# Allegro board SENSOR_PLATFORM_BREAKOUT_BOARD_REV01_2014-08-13.brd
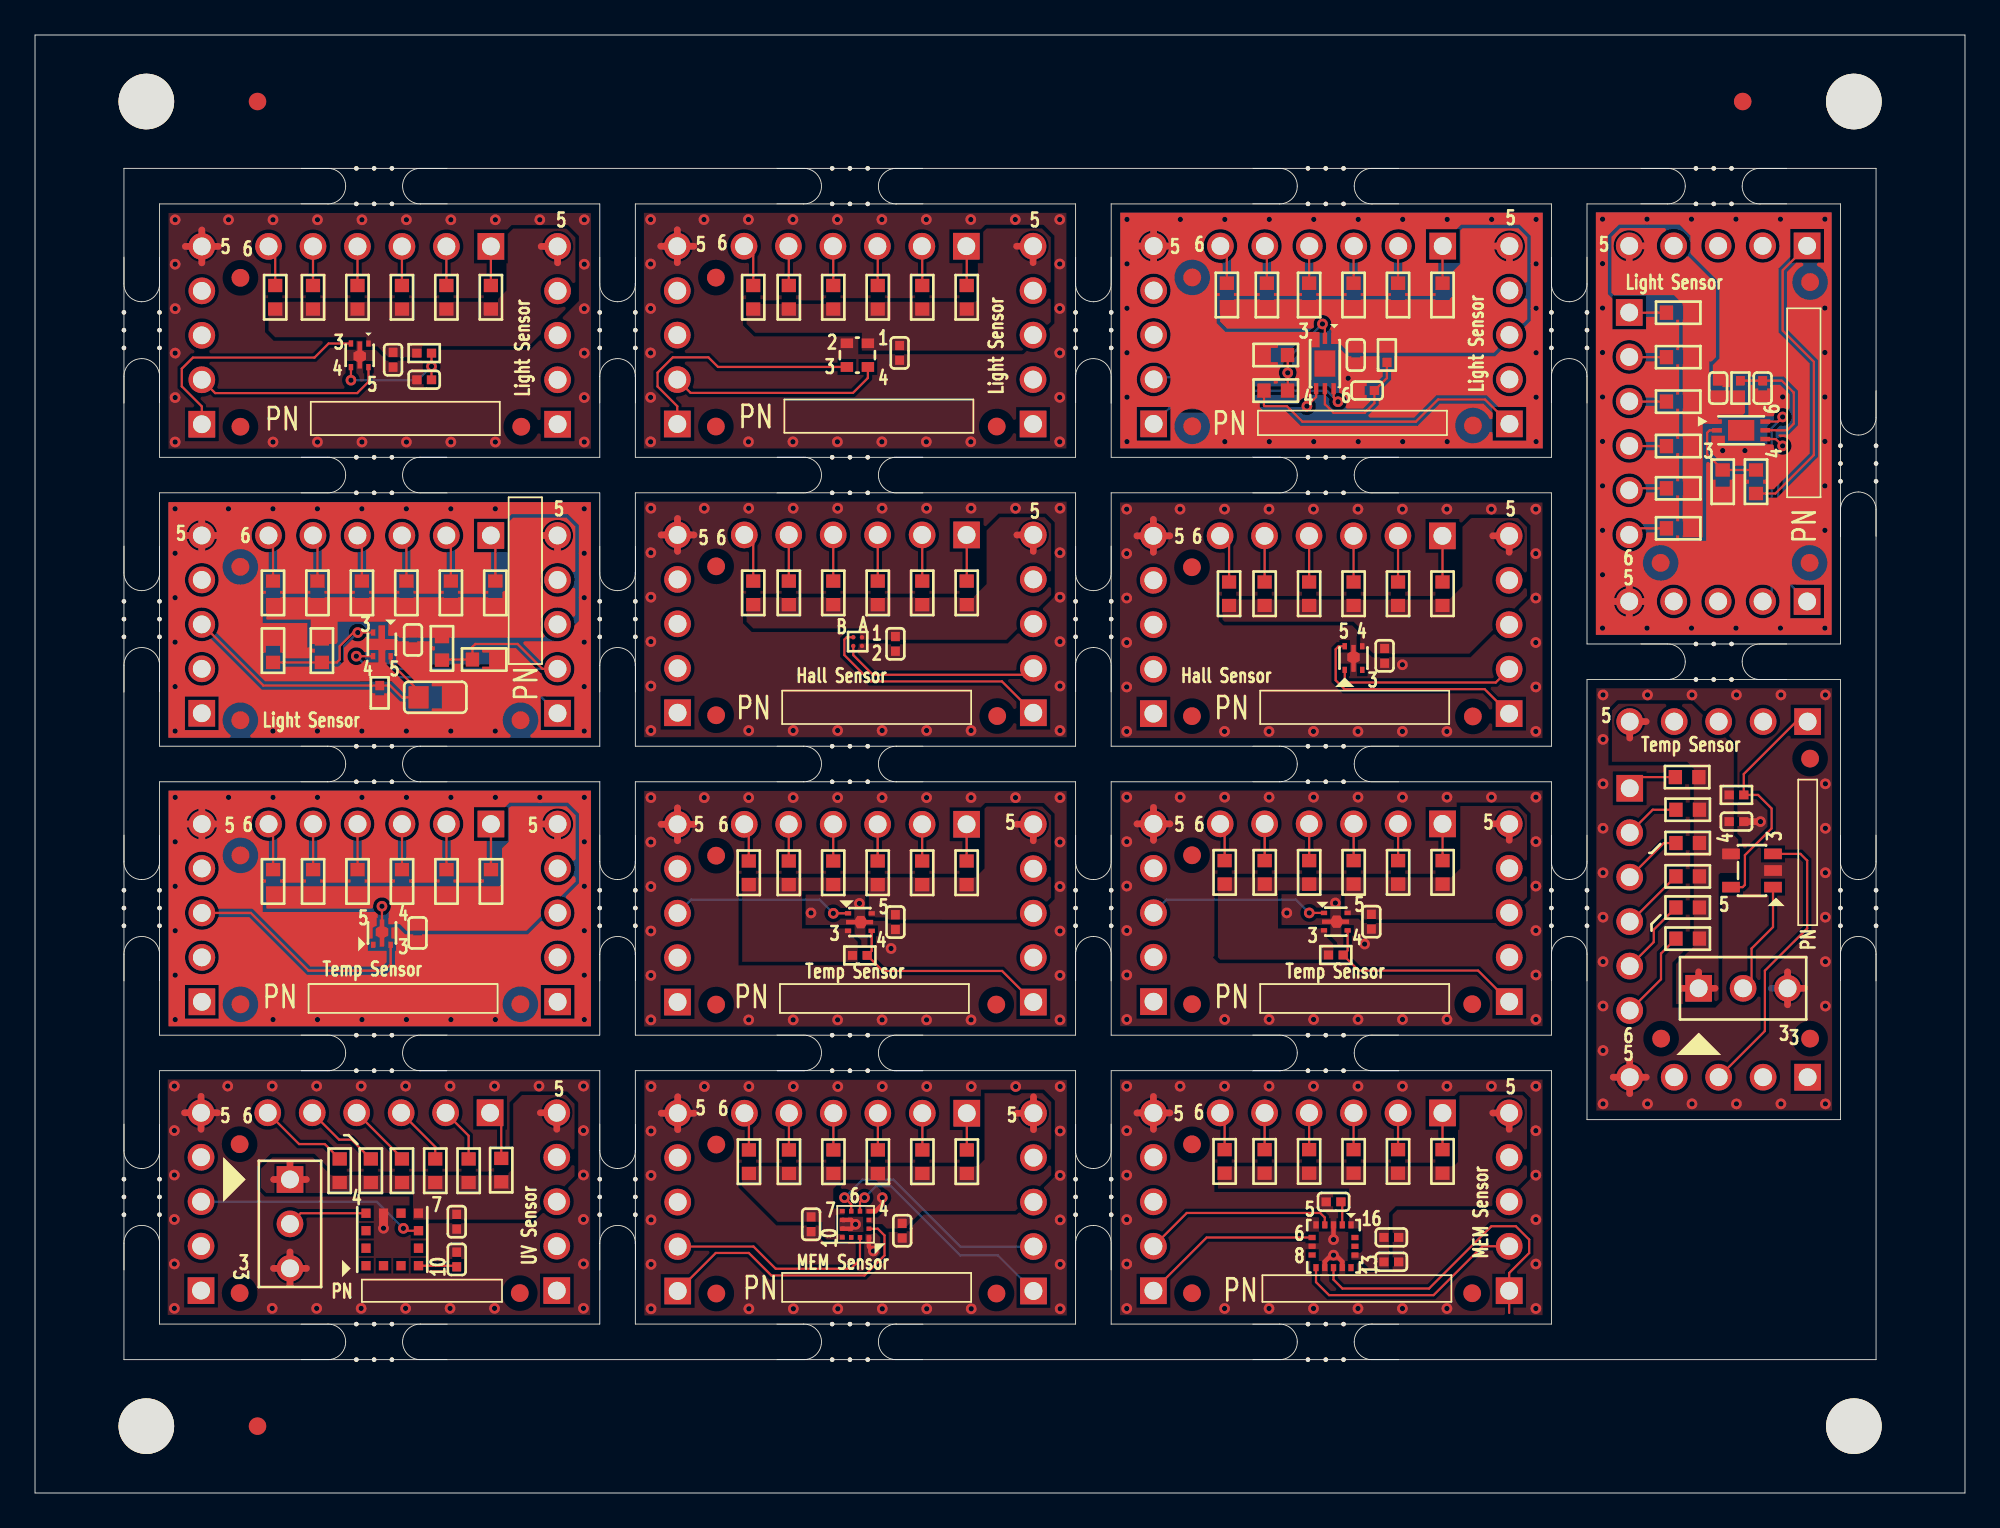
[diagram p0: board, top side]
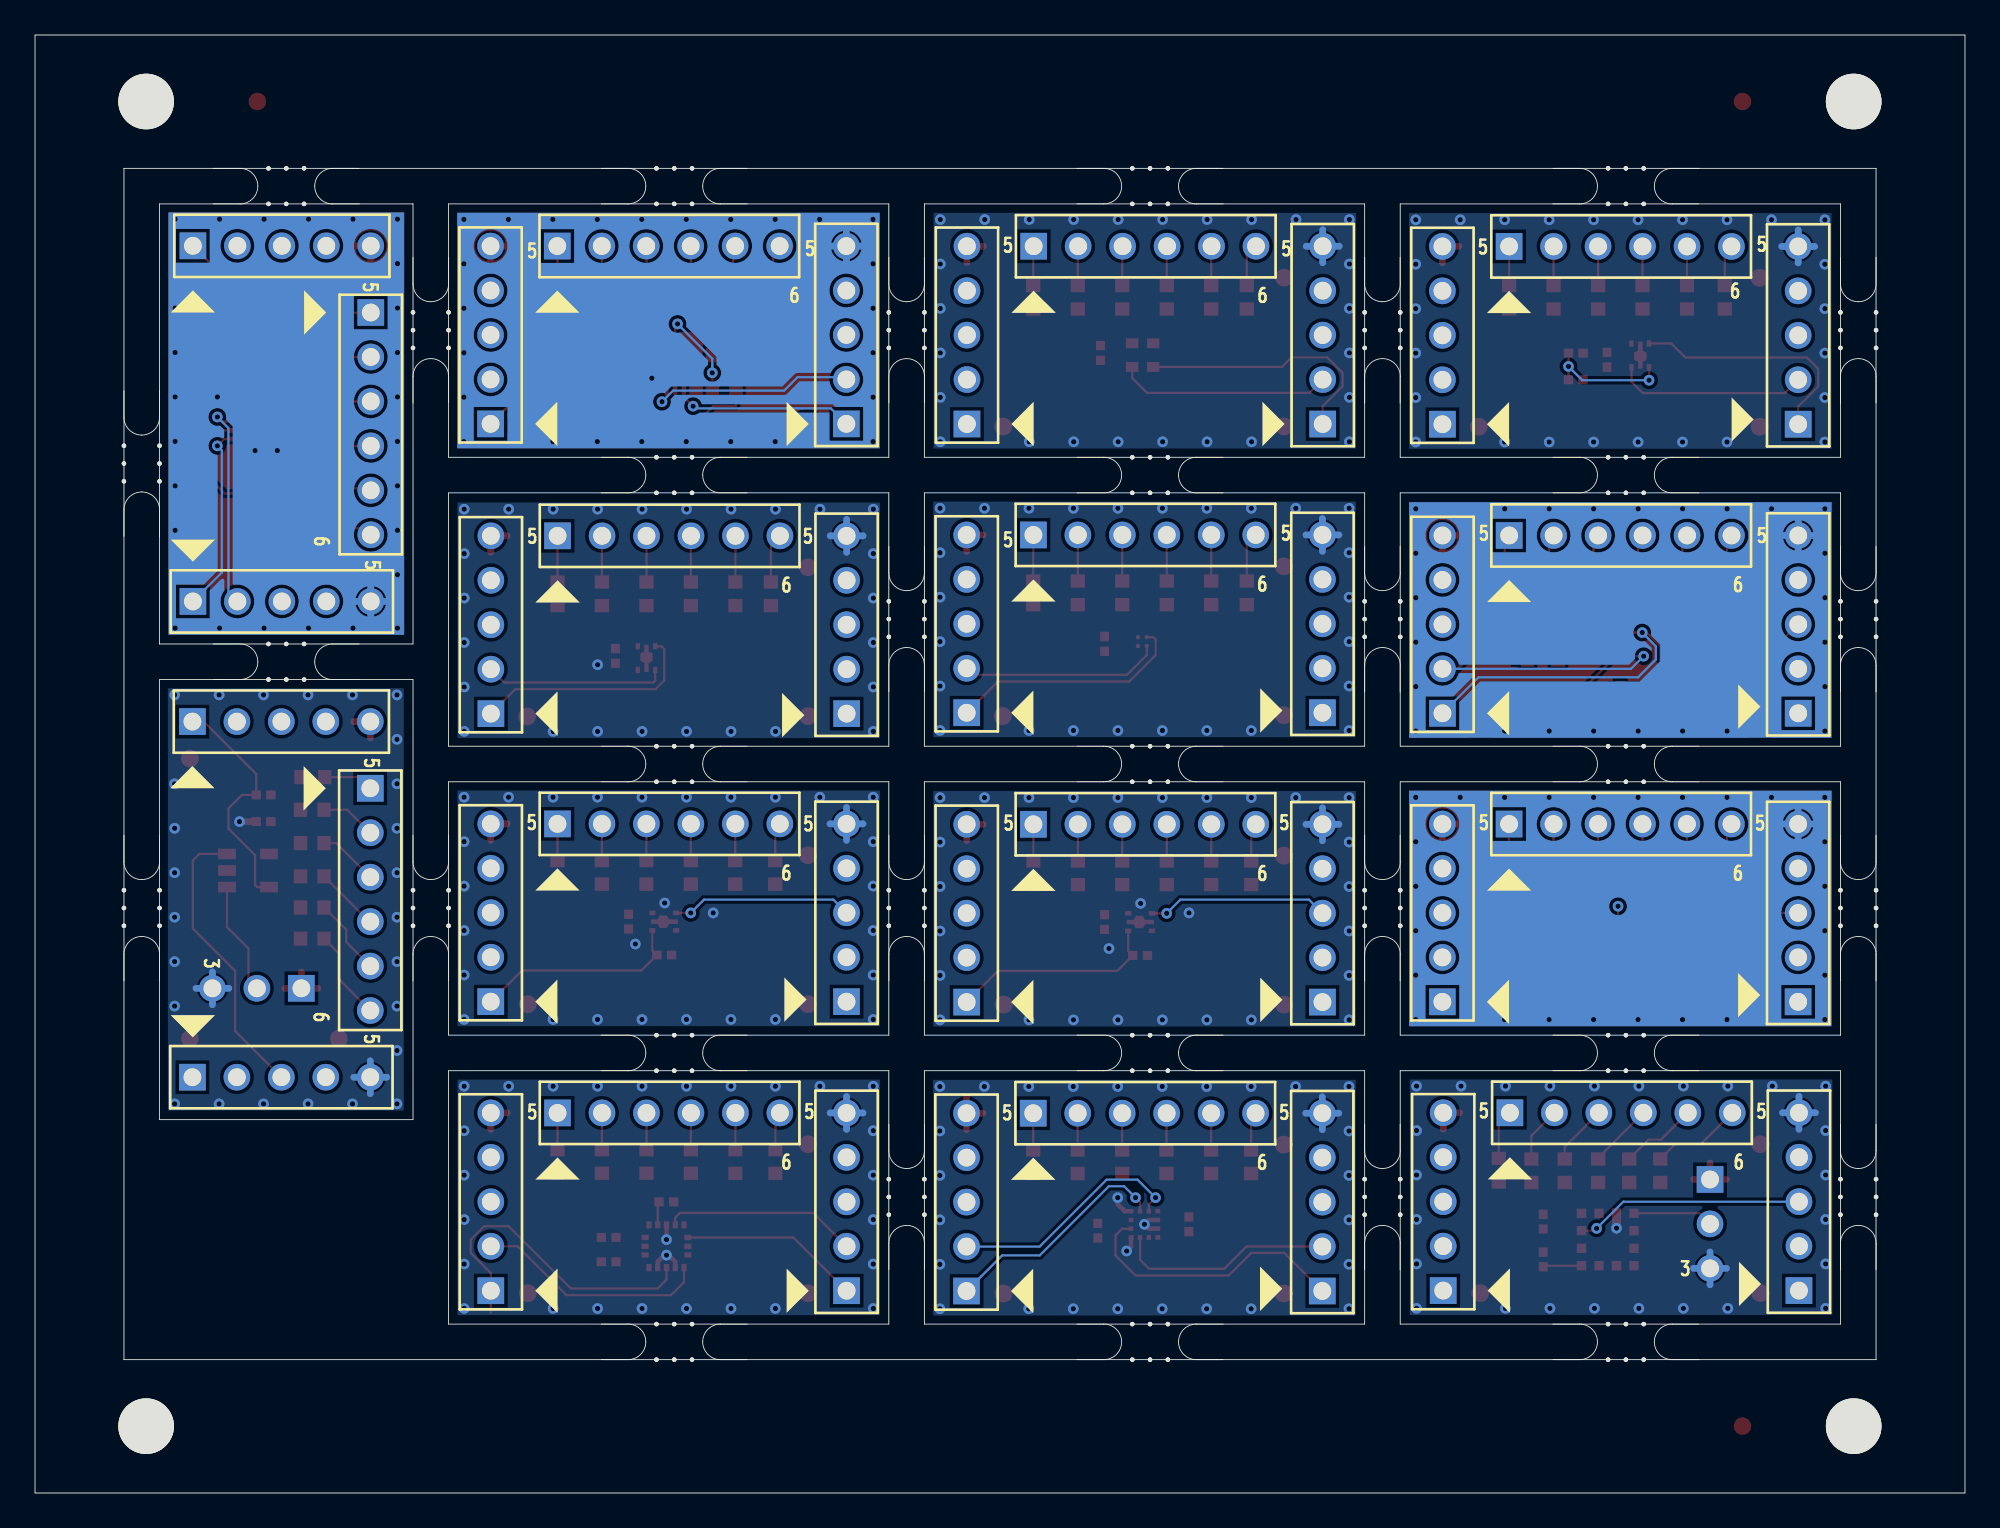
[diagram p1: board, bottom side, seen from below]

Outline 110.24 x 83.31 mm; copper layers: TOP, BOTTOM. Coordinates in mm from the lower left corner of the outline.
Outline path: 0,83.31 0,0 110.24,0 110.24,83.31 0,83.31 ; 5.08,75.69 5.08,7.62 105.16,7.62 105.16,75.69 5.08,75.69 ; 7.11,73.66 7.11,59.18 32.26,59.18 32.26,73.66 7.11,73.66 ; 7.11,57.15 7.11,42.67 32.26,42.67 32.26,57.15 7.11,57.15 ; 7.11,40.64 7.11,26.16 32.26,26.16 32.26,40.64 7.11,40.64 ; 7.11,24.13 7.11,9.65 32.26,9.65 32.26,24.13 7.11,24.13 ; 34.29,73.66 34.29,59.18 59.44,59.18 59.44,73.66 34.29,73.66 ; 34.29,57.15 34.29,42.67 59.44,42.67 59.44,57.15 34.29,57.15 ; 34.29,40.64 34.29,26.16 59.44,26.16 59.44,40.64 34.29,40.64 ; 34.29,24.13 34.29,9.65 59.44,9.65 59.44,24.13 34.29,24.13 ; 61.47,73.66 61.47,59.18 86.61,59.18 86.61,73.66 61.47,73.66 ; 61.47,57.15 61.47,42.67 86.61,42.67 86.61,57.15 61.47,57.15 ; 61.47,40.64 61.47,26.16 86.61,26.16 86.61,40.64 61.47,40.64 ; 61.47,24.13 61.47,9.65 86.61,9.65 86.61,24.13 61.47,24.13 ; 88.65,73.66 88.65,48.51 103.12,48.51 103.12,73.66 88.65,73.66 ; 88.65,46.48 88.65,21.34 103.12,21.34 103.12,46.48 88.65,46.48

## Design rules (mm)
net group PWR: nets GND_AL2_1 GND_AL3_1 GND_AL3_2 GND_AL4 GND_AL7 GND_HL1_1 GND_HL2_2 GND_MEM1 GND_MEM2 GND_TE1 GND_TE2_1 GND_TE3_1 GND_TE3_7 GND_UV VDD_AL2_1 VDD_AL3_1 VDD_AL3_2 VDD_AL4 VDD_AL7 VDD_HL1_1 VDD_HL2_2 VDD_MEM1 VDD_MEM2 VDD_TE1 VDD_TE2_1 VDD_TE3_1 VDD_TE3_7 VDD_UV

## Placement (name value [footprint] x y rotation side)
C6  0.1uF  [C0402]  21.59 48.75 270 top
C7  0.1uF  [C0402]  20.45 64.75 270 top
C9  1uF  [C0402]  22.23 63.61 180 top
C10  0.1uF  [C0402]  49.39 65.15 270 top
C11  0.1uF  [C0402]  96.14 63.14 90 top
C12  1uF  [C0402]  98.68 63.14 270 top
C13  0.1uF  [C0402]  49.15 48.52 270 top
C18  0.1uF  [C0402]  21.85 32 270 top
C19  0.1uF  [C0402]  49.15 32.62 270 top
C20  0.1uF  [C0402]  24.09 15.5 270 top
C21  1nF  [C0402]  24.09 13.34 90 top
C22  0.1uF  [C0402]  77.47 13.21 0 top
C23  0.1uF  [C0402]  77.47 14.61 0 top
C24  1uF  [C0402]  74.17 16.64 180 top
C25  0.1uF  [C0402]  44.33 15.35 90 top
C26  0.1uF  [C0402]  49.53 14.99 270 top
C35  0.1uF  [C0402]  97.18 38.36 0 top
C39  0.1uF  [C0402]  75.44 65.02 270 top
C40  1uF  [C0402]  76.09 63 180 top
C50  0.1uF  [C0402]  77.09 47.84 270 top
C64  0.1uF  [C0402]  76.33 32.65 270 top
C78  22uF  [C0805]  22.86 45.47 0 top
J6  3-PIN Jumper  [HDR_THVT_1X3_100]  95.02 28.84 0 top
J7  3-PIN Jumper  [HDR_THVT_1X3_100]  14.56 17.92 270 top
NOREF  -  [unnamed]  12.71 79.51 90 top
NOREF#2  -  [unnamed#2]  33.27 49.94 270 top
NOREF#3  -  [unnamed#2]  73.72 25.15 180 top
NOREF#4  -  [unnamed]  66.08 19.92 90 top
NOREF#5  -  [unnamed]  92.85 53.15 180 top
NOREF#6  -  [#3]  6.36 3.82 0 top
NOREF#7  -  [#3]  110.24 0 0 top
NOREF#8  -  [#3]  -96.65 -223.79 0 top
NOREF#9  -  [unnamed]  38.9 36.42 90 top
NOREF#10  -  [unnamed]  11.73 60.93 90 top
NOREF#11  -  [unnamed#2]  6.1 33.43 270 top
NOREF#12  -  [#3]  6.36 79.51 0 top
NOREF#13  -  [#3]  7.11 40.64 0 top
NOREF#14  -  [unnamed]  82.13 61 90 top
NOREF#15  -  [#3]  88.65 21.34 0 top
NOREF#16  -  [unnamed]  54.92 11.4 90 top
NOREF#17  -  [unnamed#2]  33.27 66.45 270 top
NOREF#18  -  [unnamed#2]  6.1 49.94 270 top
NOREF#19  -  [unnamed]  54.91 27.91 90 top
NOREF#20  -  [unnamed]  101.36 53.15 180 top
NOREF#21  -  [unnamed#4]  103.89 79.51 180 top
NOREF#22  -  [unnamed]  38.9 27.91 90 top
NOREF#23  -  [unnamed]  38.89 69.45 90 top
NOREF#24  -  [#3]  6.1 16.92 0 top
NOREF#25  -  [unnamed#2]  60.45 66.45 270 top
NOREF#26  -  [#3]  73.72 8.64 0 top
NOREF#27  -  [unnamed]  38.9 52.95 90 top
NOREF#28  -  [unnamed]  12.71 3.82 270 top
NOREF#29  -  [unnamed]  66.09 36.44 90 top
NOREF#30  -  [#3]  6.1 33.43 0 top
NOREF#31  -  [unnamed#4]  6.36 3.82 0 top
NOREF#32  -  [unnamed#2]  19.37 58.17 180 top
NOREF#33  -  [unnamed#2]  60.45 16.92 270 top
NOREF#34  -  [unnamed]  92.88 25.96 180 top
NOREF#35  -  [unnamed#2]  33.27 33.43 270 top
NOREF#36  -  [unnamed]  11.73 36.43 90 top
NOREF#37  -  [unnamed]  38.91 19.91 90 top
NOREF#38  -  [#3]  86.61 9.65 0 top
NOREF#39  -  [unnamed#2]  6.1 66.45 270 top
NOREF#40  -  [#3]  6.1 49.94 0 top
NOREF#41  -  [unnamed]  82.13 44.37 90 top
NOREF#42  -  [#3]  59.44 9.65 0 top
NOREF#43  -  [unnamed#2]  46.55 8.64 180 top
NOREF#44  -  [#3]  7.11 57.15 0 top
NOREF#45  -  [#3]  105.16 7.62 0 top
NOREF#46  -  [#3]  5.08 7.62 0 top
NOREF#47  -  [#3]  104.14 33.43 0 top
NOREF#48  -  [unnamed#2]  6.1 16.92 270 top
NOREF#49  -  [unnamed]  38.9 44.44 90 top
NOREF#50  -  [#3]  7.11 9.65 0 top
NOREF#51  -  [unnamed#2]  46.55 41.66 180 top
NOREF#52  -  [unnamed]  11.73 27.92 90 top
NOREF#53  -  [unnamed]  66.08 11.42 90 top
NOREF#54  -  [unnamed#4]  6.36 79.51 180 top
NOREF#55  -  [unnamed#2]  46.55 74.68 180 top
NOREF#56  -  [unnamed]  82.09 27.93 90 top
NOREF#57  -  [#3]  104.14 58.83 0 top
NOREF#58  -  [#3]  5.08 75.69 0 top
NOREF#59  -  [#3]  6.1 66.45 0 top
NOREF#60  -  [unnamed#2]  19.37 74.68 180 top
NOREF#61  -  [unnamed]  27.77 60.93 90 top
NOREF#62  -  [unnamed]  66.08 44.39 90 top
NOREF#63  -  [unnamed#2]  104.14 33.43 270 top
NOREF#64  -  [unnamed#4]  103.89 3.82 180 top
NOREF#65  -  [#3]  19.37 8.64 0 top
NOREF#66  -  [unnamed]  11.69 19.93 90 top
NOREF#67  -  [unnamed#2]  73.72 8.64 180 top
NOREF#68  -  [#3]  6.36 3.82 0 top
NOREF#69  -  [unnamed#2]  19.37 41.66 180 top
NOREF#70  -  [#3]  6.36 79.51 0 top
NOREF#71  -  [unnamed]  66.09 27.93 90 top
NOREF#72  -  [#3]  7.11 59.18 0 top
NOREF#73  -  [unnamed]  27.72 27.93 90 top
NOREF#74  -  [unnamed]  66.08 52.9 90 top
NOREF#75  -  [unnamed#2]  95.89 47.5 180 top
NOREF#76  -  [#3]  7.11 24.13 0 top
NOREF#77  -  [unnamed#2]  46.55 25.15 180 top
NOREF#78  -  [unnamed]  27.69 11.42 90 top
NOREF#79  -  [#3]  110.24 0 90 top
NOREF#80  -  [#3]  32.26 9.65 0 top
NOREF#81  -  [unnamed]  27.73 44.16 90 top
NOREF#82  -  [unnamed]  66.1 60.95 90 top
NOREF#83  -  [unnamed]  38.91 11.4 90 top
NOREF#84  -  [unnamed#2]  46.55 58.17 180 top
NOREF#85  -  [#3]  95.89 47.5 0 top
NOREF#86  -  [#3]  46.55 8.64 0 top
NOREF#87  -  [unnamed]  101.39 69.19 180 top
NOREF#88  -  [#3]  4.83 -23.32 0 top
NOREF#89  -  [unnamed#2]  87.63 33.43 270 top
NOREF#90  -  [#3]  103.12 21.34 0 top
NOREF#91  -  [#3]  103.89 3.82 0 top
NOREF#92  -  [#3]  7.11 26.16 0 top
NOREF#93  -  [unnamed]  11.73 69.44 90 top
NOREF#94  -  [#3]  0 0 0 top
NOREF#95  -  [unnamed#2]  95.89 74.68 180 top
NOREF#96  -  [#3]  7.11 73.66 0 top
NOREF#97  -  [unnamed#2]  60.45 33.43 270 top
NOREF#98  -  [#3]  61.47 9.65 0 top
NOREF#99  -  [unnamed#2]  73.72 41.66 180 top
NOREF#100  -  [unnamed#2]  73.72 58.17 180 top
NOREF#101  -  [#3]  7.11 42.67 0 top
NOREF#102  -  [unnamed#2]  19.37 8.64 180 top
NOREF#103  -  [unnamed]  66.1 69.46 90 top
NOREF#104  -  [unnamed]  82.09 11.42 90 top
NOREF#105  -  [unnamed#2]  104.14 58.83 270 top
NOREF#106  -  [unnamed#2]  19.37 25.15 180 top
NOREF#107  -  [#3]  5.08 7.62 0 top
NOREF#108  -  [unnamed]  97.54 79.51 90 top
NOREF#109  -  [#3]  103.89 79.51 0 top
NOREF#110  -  [#3]  34.29 9.65 0 top
NOREF#111  -  [#3]  0 0 0 top
NOREF#112  -  [#3]  0 83.31 0 top
NOREF#113  -  [#3]  0 83.31 0 top
NOREF#114  -  [unnamed]  54.93 60.94 90 top
NOREF#115  -  [unnamed]  11.69 11.42 90 top
NOREF#116  -  [unnamed]  101.39 41.97 180 top
NOREF#117  -  [unnamed#2]  73.72 74.68 180 top
NOREF#118  -  [unnamed#2]  33.27 16.92 270 top
NOREF#119  -  [unnamed]  11.73 52.92 90 top
NOREF#120  -  [unnamed#2]  87.63 66.45 270 top
NOREF#121  -  [unnamed]  54.96 44.4 90 top
NOREF#122  -  [unnamed#2]  60.45 49.94 270 top
NOREF#123  -  [unnamed]  101.39 25.96 180 top
NOREF#124  -  [unnamed]  38.89 60.94 90 top
NOREF#125  -  [unnamed]  11.73 44.16 90 top
R22  1K  [R0402]  22.23 65.14 0 top
R23  0  [R0603]  98.3 57.78 90 top
R24  0  [R0603]  96.4 57.78 270 top
R25  1K  [R0402]  97.41 63.14 270 top
R32  10K  [R0402]  97.18 39.89 0 top
R33  10K  [R0402]  47.11 30.72 0 top
R87  10K  [R0402]  74.3 30.74 0 top
R109  0  [R0603]  70.87 65.02 180 top
R110  0  [R0603]  70.87 62.99 0 top
R113  1K  [R0402]  77.22 65.02 90 top
R128  0  [R0603]  13.59 48.13 90 top
R129  4.7K  [R0603]  16.39 48.13 270 top
R130  0  [R0603]  25.66 47.62 0 top
R131  4.7K  [R0603]  23.24 48.26 270 top
R132  5.6K  [R0402]  19.69 45.72 90 top
R155  0  [R0603]  53.22 51.44 90 top
R156  0  [R0603]  50.68 51.44 90 top
R157  0  [R0603]  48.14 51.44 90 top
R158  0  [R0603]  45.6 51.44 90 top
R159  0  [R0603]  43.06 51.44 90 top
R160  0  [R0603]  41.02 51.44 90 top
R161  0  [R0603]  80.39 51.38 90 top
R162  0  [R0603]  77.85 51.38 90 top
R163  0  [R0603]  75.31 51.38 90 top
R164  0  [R0603]  72.77 51.38 90 top
R165  0  [R0603]  70.23 51.38 90 top
R166  0  [R0603]  68.2 51.38 90 top
R167  0  [R0603]  26.29 51.44 90 top
R168  0  [R0603]  23.75 51.44 90 top
R169  0  [R0603]  21.21 51.44 90 top
R170  0  [R0603]  18.67 51.44 90 top
R171  0  [R0603]  16.13 51.44 90 top
R172  0  [R0603]  13.59 51.44 90 top
R173  0  [R0603]  80.39 68.45 90 top
R174  0  [R0603]  77.85 68.45 90 top
R175  0  [R0603]  75.31 68.45 90 top
R176  0  [R0603]  72.77 68.45 90 top
R177  0  [R0603]  70.36 68.45 90 top
R178  0  [R0603]  68.07 68.45 90 top
R179  0  [R0603]  93.86 67.44 180 top
R180  0  [R0603]  93.86 64.9 180 top
R181  0  [R0603]  93.86 62.36 180 top
R182  0  [R0603]  93.86 59.82 180 top
R183  0  [R0603]  93.86 57.41 180 top
R184  0  [R0603]  93.86 55.12 180 top
R185  0  [R0603]  26.04 68.33 90 top
R186  0  [R0603]  23.5 68.33 90 top
R187  0  [R0603]  20.96 68.33 90 top
R188  0  [R0603]  18.42 68.33 90 top
R189  0  [R0603]  15.88 68.33 90 top
R190  0  [R0603]  13.72 68.33 90 top
R191  0  [R0603]  53.22 68.33 90 top
R192  0  [R0603]  50.68 68.33 90 top
R193  0  [R0603]  48.14 68.33 90 top
R194  0  [R0603]  45.6 68.33 90 top
R195  0  [R0603]  43.06 68.33 90 top
R196  0  [R0603]  41.02 68.33 90 top
R197  0  [R0603]  26.63 18.45 90 top
R198  0  [R0603]  24.77 18.41 90 top
R199  0  [R0603]  22.86 18.41 90 top
R200  0  [R0603]  20.96 18.41 90 top
R201  0  [R0603]  19.18 18.41 90 top
R202  0  [R0603]  17.4 18.41 90 top
R203  0  [R0603]  53.22 18.93 90 top
R204  0  [R0603]  50.68 18.93 90 top
R205  0  [R0603]  48.14 18.93 90 top
R206  0  [R0603]  45.6 18.93 90 top
R207  0  [R0603]  43.06 18.93 90 top
R208  0  [R0603]  40.78 18.93 90 top
R209  0  [R0603]  80.39 18.95 90 top
R210  0  [R0603]  77.85 18.95 90 top
R211  0  [R0603]  75.31 18.95 90 top
R212  0  [R0603]  72.77 18.95 90 top
R213  0  [R0603]  70.23 18.95 90 top
R214  0  [R0603]  67.95 18.95 90 top
R215  0  [R0603]  26.04 34.95 90 top
R216  0  [R0603]  23.5 34.95 90 top
R217  0  [R0603]  20.96 34.95 90 top
R218  0  [R0603]  18.42 34.95 90 top
R219  0  [R0603]  15.88 34.95 90 top
R220  0  [R0603]  13.6 34.95 90 top
R221  0  [R0603]  53.21 35.44 90 top
R222  0  [R0603]  50.67 35.44 90 top
R223  0  [R0603]  48.13 35.44 90 top
R224  0  [R0603]  45.59 35.44 90 top
R225  0  [R0603]  43.05 35.44 90 top
R226  0  [R0603]  40.77 35.44 90 top
R227  0  [R0603]  80.4 35.46 90 top
R228  0  [R0603]  77.86 35.46 90 top
R229  0  [R0603]  75.32 35.46 90 top
R230  0  [R0603]  72.78 35.46 90 top
R231  0  [R0603]  70.24 35.46 90 top
R232  0  [R0603]  67.95 35.46 90 top
R233  0  [R0603]  94.37 40.91 180 top
R234  0  [R0603]  94.4 39.04 180 top
R235  0  [R0603]  94.4 37.14 180 top
R236  0  [R0603]  94.4 35.23 180 top
R237  0  [R0603]  94.4 33.46 180 top
R238  0  [R0603]  94.4 31.68 180 top
U9  SensorInterfaceHeader_1  [HDR_THVT_1X5_100]  29.85 44.55 90 bottom
U10  BH1620FVC  [WSOF5]  19.81 48.49 0 top
U11  SensorInterfaceHeader_2  [CONN_THVT_1X5_100]  9.53 44.55 90 bottom
U12  SensorInterfaceHeader_1  [HDR_THVT_1X5_100]  29.85 61.07 90 bottom
U13  BH1721FVC  [WSOF5]  18.55 65.01 0 top
U14  SensorInterfaceHeader_2  [CONN_THVT_1X5_100]  9.53 61.07 90 bottom
U16  SensorInterfaceHeader_3  [HDR_THVT_1X6_100]  26.04 54.71 180 bottom
U17  SensorInterfaceHeader_3  [HDR_THVT_1X6_100]  26.04 71.23 180 bottom
U18  SensorInterfaceHeader_1  [HDR_THVT_1X5_100]  57.01 61.08 90 bottom
U19  BH1780GLI  [WLGA04IW02]  46.97 65.02 270 top
U20  SensorInterfaceHeader_2  [CONN_THVT_1X5_100]  36.69 61.08 90 bottom
U21  SensorInterfaceHeader_1  [HDR_THVT_1X5_100]  101.22 71.26 180 bottom
U22  BH1730FVC  [WSOF6]  97.45 60.72 270 top
U23  SensorInterfaceHeader_2  [CONN_THVT_1X5_100]  101.22 50.94 180 bottom
U24  SensorInterfaceHeader_3  [HDR_THVT_1X6_100]  53.2 71.24 180 bottom
U25  SensorInterfaceHeader_3  [HDR_THVT_1X6_100]  91.06 67.45 270 bottom
U26  SensorInterfaceHeader_1  [HDR_THVT_1X5_100]  57.02 44.59 90 bottom
U27  BU52004GUL  [VCSP50L1]  46.99 48.65 270 top
U28  SensorInterfaceHeader_2  [CONN_THVT_1X5_100]  36.7 44.59 90 bottom
U32  SensorInterfaceHeader_3  [HDR_THVT_1X6_100]  53.21 54.75 180 bottom
U46  SensorInterfaceHeader_2  [CONN_THVT_1X5_100]  101.25 23.76 180 bottom
U47  SensorInterfaceHeader_1  [HDR_THVT_1X5_100]  29.85 28.07 90 bottom
U48  BD1020HFV  [HVSOF5]  19.82 32 180 top
U49  SensorInterfaceHeader_2  [CONN_THVT_1X5_100]  9.53 28.07 90 bottom
U50  SensorInterfaceHeader_1  [HDR_THVT_1X5_100]  101.25 44.08 180 bottom
U51  BDE0600G  [SSOP5]  98.07 35.57 270 top
U52  SensorInterfaceHeader_3  [HDR_THVT_1X6_100]  91.09 40.27 270 bottom
U53  SensorInterfaceHeader_3  [HDR_THVT_1X6_100]  26.04 38.23 180 bottom
U54  BDJ0601HFV  [HVSOF5]  47.11 32.62 90 top
U55  SensorInterfaceHeader_1  [HDR_THVT_1X5_100]  57.02 28.05 90 bottom
U56  SensorInterfaceHeader_2  [CONN_THVT_1X5_100]  36.7 28.05 90 bottom
U57  SensorInterfaceHeader_3  [HDR_THVT_1X6_100]  53.21 38.21 180 bottom
U58  SensorInterfaceHeader_1  [HDR_THVT_1X5_100]  29.8 11.57 90 bottom
U59  ML8511  [TQFN12]  20.4 14.49 0 top
U60  SensorInterfaceHeader_2  [CONN_THVT_1X5_100]  9.48 11.57 90 bottom
U61  SensorInterfaceHeader_3  [HDR_THVT_1X6_100]  25.99 21.73 180 bottom
U62  SensorInterfaceHeader_1  [HDR_THVT_1X5_100]  57.03 11.54 90 bottom
U63  KX022  [LGA_2X2X0P9]  46.87 15.35 180 top
U64  SensorInterfaceHeader_2  [CONN_THVT_1X5_100]  36.71 11.54 90 bottom
U65  SensorInterfaceHeader_1  [HDR_THVT_1X5_100]  84.2 11.56 90 bottom
U66  KMX61  [LGA_3X3X0P9]  74.17 14.1 180 top
U67  SensorInterfaceHeader_2  [CONN_THVT_1X5_100]  63.88 11.56 90 bottom
U68  SensorInterfaceHeader_3  [HDR_THVT_1X6_100]  53.22 21.7 180 bottom
U69  SensorInterfaceHeader_3  [HDR_THVT_1X6_100]  80.39 21.72 180 bottom
U82  SensorInterfaceHeader_3  [HDR_THVT_1X6_100]  80.41 71.25 180 bottom
U83  SensorInterfaceHeader_1  [HDR_THVT_1X5_100]  84.22 61.09 90 bottom
U84  BH1710FVC  [WSOF6_FIT]  73.67 64.54 180 top
U85  SensorInterfaceHeader_2  [CONN_THVT_1X5_100]  63.9 61.09 90 bottom
U110  BU52011HFV  [HVSOF5]  75.31 47.71 180 top
U111  SensorInterfaceHeader_1  [HDR_THVT_1X5_100]  84.2 44.53 90 bottom
U112  SensorInterfaceHeader_3  [HDR_THVT_1X6_100]  80.39 54.69 180 bottom
U113  SensorInterfaceHeader_2  [CONN_THVT_1X5_100]  63.88 44.53 90 bottom
U166  SensorInterfaceHeader_2  [CONN_THVT_1X5_100]  63.88 28.07 90 bottom
U167  BDJ0550HFV  [HVSOF5]  74.3 32.65 90 top
U168  SensorInterfaceHeader_1  [HDR_THVT_1X5_100]  84.2 28.07 90 bottom
U169  SensorInterfaceHeader_3  [HDR_THVT_1X6_100]  80.39 38.23 180 bottom

## Library data of the parts
C6 C7 C9-C13 C18-C26 C35 C39 C40 C50 C64 C78 = C_2
J6 J7 = 3-PIN Jumper
R22-R25 R109 R110 R113 R128 R130 R132 = RES_1K_1%_1/8W_0805PKG
R32 R33 R87 R129 R131 = RES_10K_1%_1/8W_0805PKG
R155-R238 = R
U9 U12 U18 U21 U26 U47 U50 U55 U58 U62 U65 U83 U111 U168 = SensorInterfaceHeader_1
U10 = WSOF5_1
U11 U14 U20 U23 U28 U46 U49 U56 U60 U64 U67 U85 U113 U166 = SensorInterfaceHeader_2
U13 = WSOF5_0
U16 U17 U24 U25 U32 U52 U53 U57 U61 U68 U69 U82 U112 U169 = SensorInterfaceHeader_3
U19 = WLGA04IW02_0
U22 = WSOF6_2
U27 = VCSP50L1
U48 = HVSOF5_2
U51 = HVSOF5_3
U54 U167 = HVSOF5_4
U59 = C-TQFN12-4.0x3.7-1_5.00
U63 = LGA_1.9
U66 = LGA_2.9
U84 = WSOF6_3
U110 = HVSOF5_1

## Footprints (pads in the part's own frame, mm; a bottom-side part is the same pattern mirrored in y, then rotated)
C0402
  rect 0.533x0.508 smd: 1(-0.419,0) 2(0.419,0)
C0805
  rect 1.143x1.27 smd: 1(-0.953,0) 2(0.953,0)
CONN_THVT_1X5_100
  rect 1.524x1.524 hole 1.016: 1(0,0)
  round 1.524 hole 1.016: 2(2.54,0) 3(5.08,0) 4(7.62,0) 5(10.16,0)
HDR_THVT_1X3_100
  rect 1.524x1.524 hole 1.016: 1(0,0)
  round 1.524 hole 1.016: 2(2.54,0) 3(5.08,0)
HDR_THVT_1X5_100
  rect 1.524x1.524 hole 1.016: 1(0,0)
  round 1.524 hole 1.016: 2(2.54,0) 3(5.08,0) 4(7.62,0) 5(10.16,0)
HDR_THVT_1X6_100
  rect 1.524x1.524 hole 1.016: 1(0,0)
  round 1.524 hole 1.016: 2(2.54,0) 3(5.08,0) 4(7.62,0) 5(10.16,0) 6(12.7,0)
HVSOF5
  rect 0.254x0.356 smd: 1(0.5,0.675) 3(-0.5,0.675) 4(-0.5,-0.675) 5(0.5,-0.675)
  custom 0.711x1.549 smd: 2(0,0.015)
LGA_2X2X0P9
  rect 0.279x0.254 smd: 1(-0.763,0.75) 2(-0.763,0.25) 3(-0.763,-0.25) 4(-0.763,-0.75) 7(0.763,-0.75) 8(0.763,-0.25) 9(0.763,0.25) 10(0.763,0.75)
  rect 0.254x0.279 smd: 5(-0.25,-0.75) 6(0.25,-0.75) 11(0.25,0.75) 12(-0.25,0.75)
LGA_3X3X0P9
  rect 0.305x0.406 smd: 1(-1,-1.222) 2(-0.5,-1.222) 3(0,-1.222) 4(0.5,-1.222) 5(1,-1.222) 9(1,1.222) 10(0.5,1.222) 11(0,1.222) 12(-0.5,1.222) 13(-1,1.222)
  rect 0.406x0.305 smd: 6(1.222,-0.5) 7(1.222,0) 8(1.222,0.5) 14(-1.222,0.5) 15(-1.222,0) 16(-1.222,-0.5)
R0402
  rect 0.533x0.508 smd: 1(-0.419,0) 2(0.419,0)
R0603
  rect 0.762x0.813 smd: 1(-0.673,0) 2(0.673,0)
SSOP5
  rect 0.61x1.016 smd: 1(0.95,1.2) 2(0,1.2) 3(-0.95,1.2) 4(-0.95,-1.2) 5(0.95,-1.2)
TQFN12
  rect 0.533x0.533 smd: 1(-1.5,-1.5) 2(-1.5,-0.5) 3(-1.5,0.5) 4(-1.5,1.5) 5(-0.5,1.5) 6(0.5,1.5) 7(1.5,1.5) 8(1.5,0.5) 9(1.5,-0.5) 10(1.5,-1.5) 11(0.5,-1.5) 12(-0.5,-1.5)
unnamed
  round 1 smd: 1(0,0)
unnamed#2
  round 0.254 hole 0.508 unplated: (-1.016,1.016) (-1.016,-1.016) (0,1.016) (0,-1.016) (1.016,1.016) (1.016,-1.016)
unnamed#4
  round 3.175 hole 3.175 unplated: (0,0)
VCSP50L1
  round 0.254 smd: A1(-0.25,0.25) A2(0.25,0.25) B1(-0.25,-0.25) B2(0.25,-0.25)
WLGA04IW02
  rect 0.559x0.711 smd: 1(-0.675,0.6) 2(-0.675,-0.6) 3(0.675,-0.6) 4(0.675,0.6)
WSOF5
  rect 0.254x0.356 smd: 1(0.5,0.675) 3(-0.5,0.675) 4(-0.5,-0.675) 5(0.5,-0.675)
  custom 0.711x1.549 smd: 2(0,0.015)
WSOF6
  rect 1.194x1.499 smd: (0,0)
  rect 0.254x0.559 smd: 1(-0.5,-1.379) 2(0,-1.379) 3(0.5,-1.379) 4(0.5,1.379) 5(0,1.379) 6(-0.5,1.379)
WSOF6_FIT
  rect 1.194x1.499 smd: (0,0)
  rect 0.305x0.635 smd: 1(-0.525,-1.438)
  rect 0.254x0.635 smd: 2(0,-1.438) 3(0.5,-1.438) 4(0.5,1.438) 5(0,1.438) 6(-0.5,1.438)

## Nets
GND_AL2_1: C6.2 C78.2 R128.2 R130.2 R132.1 U10.2(GND) U11.5(GND)
GND_AL3_1: C11.2 C12.2 R24.2 U22.3(GND) U23.5(GND)
GND_AL3_2: C39.2 C40.2 R109.2 U84.3(GND) U85.5(GND)
GND_AL4: C7.2 C9.2 U13.2(GND) U14.5(GND)
GND_AL7: C10.2 U19.2(GND) U20.5(GND)
GND_HL1_1: C13.2 U27.A2(GND) U28.5(GND)
GND_HL2_2: C50.2 U110.2(GND) U113.5(GND)
GND_MEM1: C25.1 C26.2 U63.1(ADDR) U63.4(TRIG) U63.8(GND#8) U63.9(GND#9) U64.5(GND)
GND_MEM2: C22.2 C23.2 C24.2 U66.3(GND#3) U66.5(GND#5) U66.7(ADDR) U66.10(TRIG) U66.12(GND#12) U67.5(GND)
GND_TE1: C18.2 U48.5(GND) U49.5(GND)
GND_TE2_1: C35.2 J6.3 U46.5(GND) U51.2(GND)
GND_TE3_1: C19.2 U54.2(GND) U56.5(GND)
GND_TE3_7: C64.2 U166.5(GND) U167.2(GND)
GND_UV: C20.2 C21.2 J7.3 U59.5(GND) U60.5(GND)
VDD_AL2_1: C6.1 R129.1 R131.1 R167.1 R168.1 R169.1 R170.1 R171.1 R172.1 U9.5(VDD) U10.1(VCC)
VDD_AL3_1: C11.1 R25.2 R179.1 R180.1 R181.1 R182.1 R183.1 R184.1 U21.5(VDD) U22.1(VCC)
VDD_AL3_2: C39.1 R113.2 R173.1 R174.1 R175.1 R176.1 R177.1 R178.1 U83.5(VDD) U84.1(VCC)
VDD_AL4: C7.1 R22.1 R185.1 R186.1 R187.1 R188.1 R189.1 R190.1 U12.5(VDD) U13.1(VCC)
VDD_AL7: C10.1 R191.1 R192.1 R193.1 R194.1 R195.1 R196.1 U18.5(VDD) U19.1(VCC)
VDD_HL1_1: C13.1 R155.1 R156.1 R157.1 R158.1 R159.1 R160.1 U26.5(VDD) U27.A1(VDD)
VDD_HL2_2: C50.1 R161.1 R162.1 R163.1 R164.1 R165.1 R166.1 U110.4(VDD) U111.5(VDD)
VDD_MEM1: C25.2 C26.1 R203.1 R204.1 R205.1 R206.1 R207.1 R208.1 U62.5(VDD) U63.3(VDDIO) U63.7(VDD) U63.10(NCS)
VDD_MEM2: C22.1 C23.1 R209.1 R210.1 R211.1 R212.1 R213.1 R214.1 U65.5(VDD) U66.1(VDDIO) U66.14(VDD)
VDD_TE1: C18.1 R215.1 R216.1 R217.1 R218.1 R219.1 R220.1 U47.5(VDD) U48.4(VDD)
VDD_TE2_1: C35.1 J6.1 R32.1 R233.1 R234.1 R235.1 R236.1 R237.1 R238.1 U50.5(VDD) U51.4(VDD)
VDD_TE3_1: C19.1 R33.1 R221.1 R222.1 R223.1 R224.1 R225.1 R226.1 U54.3(PD) U54.5(VDD) U55.5(VDD)
VDD_TE3_7: C64.1 R87.1 R227.1 R228.1 R229.1 R230.1 R231.1 R232.1 U167.3(PD) U167.5(VDD) U168.5(VDD)
VDD_UV: C20.1 J7.1 R197.1 R198.1 R199.1 R200.1 R201.1 R202.1 U58.5(VDD) U59.7(VDD)
PG VIA: U48.2(PG)
N389549: J7.2 U59.4(EN)
N390736: C24.1 U66.2(CAP)
N391399: U65.1(GPIO0) U66.11(INT1)
N391445: U65.2(GPIO1) U66.9(INT2)
N442989: U59.8(OUT) U60.3(ADC0)
N447814: U62.1(GPIO0) U63.5(INT1)
N447832: U62.2(GPIO1) U63.6(INT2)
N447948: U63.12(SCL) U64.2(SCL)
N447966: U63.2(SDA) U64.1(SDA)
N450158: U66.6(SDA) U67.1(SDA)
N450176: U66.4(SCL) U67.2(SCL)
N13665519: C9.1 R22.2 U13.4(DVI)
N13665743: U13.3(SDA) U14.1(SDA)
N13665759: U13.5(SCL) U14.2(SCL)
N13666656: U19.4(SCL) U20.2(SCL)
N13666668: U19.3(SDA) U20.1(SDA)
N13667842: R128.1 R129.2 U9.1(GPIO0) U10.3(GC1)
N13667854: R130.1 R131.2 U9.2(GPIO1) U10.4(GC2)
N13667882: C78.1 R132.2 U10.5(IOUT) U11.3(ADC0)
N13672900: U84.6(SCL) U85.2(SCL)
N13672912: U84.4(SDA) U85.1(SDA)
N13672952: C40.1 R113.1 U84.5(DVI)
N13673048: R110.1 U83.1(GPIO0)
N13673052: R109.1 R110.2 U84.2(ADDR)
N13688671: U26.2(GPIO1) U27.B2(N/C)
N13688703: U26.1(GPIO0) U27.B1(OUT)
N13718310: U54.1(VTEMP) U56.3(ADC0)
N13718354: R33.2 U54.4(OS) U55.1(GPIO0)
N13730509: R87.2 U167.4(OS) U168.1(GPIO0)
N13730581: U166.3(ADC0) U167.1(VTEMP)
N13736558: U48.3(VOUT) U49.3(ADC0)
N13756973: R32.2 U50.1(GPIO0) U51.5(OS)
N13757025: U46.3(ADC0) U51.3(VTEMP)
N13757041: J6.2 U51.1(CTRL)
N13898772: R155.2 U32.1(SENSCTRL0)
N13898795: R156.2 U32.2(SENSCTRL1)
N13898839: R157.2 U32.3(SENSCTRL2)
N13898843: R158.2 U32.4(SENSCTRL3)
N13898847: R159.2 U32.5(SENSCTRL4)
N13898851: R160.2 U32.6(SENSCTRL5)
N13901484: U110.5(OUT1) U111.1(GPIO0)
N13901676: U110.1(OUT2) U111.2(GPIO1)
N13901780: R161.2 U112.1(SENSCTRL0)
N13901810: R162.2 U112.2(SENSCTRL1)
N13901830: R163.2 U112.3(SENSCTRL2)
N13901834: R164.2 U112.4(SENSCTRL3)
N13901838: R165.2 U112.5(SENSCTRL4)
N13901842: R166.2 U112.6(SENSCTRL5)
N13903337: R167.2 U16.1(SENSCTRL0)
N13903349: R168.2 U16.2(SENSCTRL1)
N13903369: R169.2 U16.3(SENSCTRL2)
N13903373: R170.2 U16.4(SENSCTRL3)
N13903377: R171.2 U16.5(SENSCTRL4)
N13903381: R172.2 U16.6(SENSCTRL5)
N13905346: R173.2 U82.1(SENSCTRL0)
N13905358: R174.2 U82.2(SENSCTRL1)
N13905378: R175.2 U82.3(SENSCTRL2)
N13905382: R176.2 U82.4(SENSCTRL3)
N13905386: R177.2 U82.5(SENSCTRL4)
N13905390: R178.2 U82.6(SENSCTRL5)
N13908753: U22.6(SCL) U23.2(SCL)
N13908765: U22.4(SDA) U23.1(SDA)
N13908801: C12.1 R25.1 U22.5(DVI)
N13908859: R23.1 U21.1(GPIO0)
N13908863: R23.2 R24.1 U22.2(INT)
N13909193: R179.2 U25.1(SENSCTRL0)
N13909205: R180.2 U25.2(SENSCTRL1)
N13909225: R181.2 U25.3(SENSCTRL2)
N13909229: R182.2 U25.4(SENSCTRL3)
N13909233: R183.2 U25.5(SENSCTRL4)
N13909237: R184.2 U25.6(SENSCTRL5)
N13909909: R185.2 U17.1(SENSCTRL0)
N13909921: R186.2 U17.2(SENSCTRL1)
N13909941: R187.2 U17.3(SENSCTRL2)
N13909945: R188.2 U17.4(SENSCTRL3)
N13909949: R189.2 U17.5(SENSCTRL4)
N13909953: R190.2 U17.6(SENSCTRL5)
N13911178: R191.2 U24.1(SENSCTRL0)
N13911190: R192.2 U24.2(SENSCTRL1)
N13911210: R193.2 U24.3(SENSCTRL2)
N13911214: R194.2 U24.4(SENSCTRL3)
N13911218: R195.2 U24.5(SENSCTRL4)
N13911222: R196.2 U24.6(SENSCTRL5)
N13915286: R198.2 U61.2(SENSCTRL1)
N13915306: R199.2 U61.3(SENSCTRL2)
N13917128: R203.2 U68.1(SENSCTRL0)
N13917140: R204.2 U68.2(SENSCTRL1)
N13917160: R205.2 U68.3(SENSCTRL2)
N13917164: R206.2 U68.4(SENSCTRL3)
N13917168: R207.2 U68.5(SENSCTRL4)
N13917172: R208.2 U68.6(SENSCTRL5)
N13918167: R209.2 U69.1(SENSCTRL0)
N13918179: R210.2 U69.2(SENSCTRL1)
N13918199: R211.2 U69.3(SENSCTRL2)
N13918203: R212.2 U69.4(SENSCTRL3)
N13918207: R213.2 U69.5(SENSCTRL4)
N13918211: R214.2 U69.6(SENSCTRL5)
N13920413: R215.2 U53.1(SENSCTRL0)
N13920425: R216.2 U53.2(SENSCTRL1)
N13920445: R217.2 U53.3(SENSCTRL2)
N13920449: R218.2 U53.4(SENSCTRL3)
N13920453: R219.2 U53.5(SENSCTRL4)
N13920457: R220.2 U53.6(SENSCTRL5)
N13921886: R221.2 U57.1(SENSCTRL0)
N13921894: R222.2 U57.2(SENSCTRL1)
N13921914: R225.2 U57.5(SENSCTRL4)
N13921918: R224.2 U57.4(SENSCTRL3)
N13921922: R223.2 U57.3(SENSCTRL2)
N13921934: R226.2 U57.6(SENSCTRL5)
N13923440: R227.2 U169.1(SENSCTRL0)
N13923452: R228.2 U169.2(SENSCTRL1)
N13923472: R229.2 U169.3(SENSCTRL2)
N13923476: R230.2 U169.4(SENSCTRL3)
N13923480: R231.2 U169.5(SENSCTRL4)
N13923484: R232.2 U169.6(SENSCTRL5)
N13928759: R233.2 U52.1(SENSCTRL0)
N13928771: R234.2 U52.2(SENSCTRL1)
N13928791: R235.2 U52.3(SENSCTRL2)
N13928795: R236.2 U52.4(SENSCTRL3)
N13928799: R237.2 U52.5(SENSCTRL4)
N13928803: R238.2 U52.6(SENSCTRL5)
N13930681: R197.2 U61.1(SENSCTRL0)
N13930699: R200.2 U61.4(SENSCTRL3)
N13930701: R201.2 U61.5(SENSCTRL4)
N13930703: R202.2 U61.6(SENSCTRL5)
N139310850: C21.1 U59.10(TR)

Pads without a net: NOREF 1; NOREF#4 1; NOREF#5 1; NOREF#9 1; NOREF#10 1; NOREF#14 1; NOREF#16 1; NOREF#19 1; NOREF#20 1; NOREF#22 1; NOREF#23 1; NOREF#27 1; NOREF#28 1; NOREF#29 1; NOREF#34 1; NOREF#36 1; NOREF#37 1; NOREF#41 1; NOREF#49 1; NOREF#52 1; NOREF#53 1; NOREF#56 1; NOREF#61 1; NOREF#62 1; NOREF#66 1; NOREF#71 1; NOREF#73 1; NOREF#74 1; NOREF#78 1; NOREF#81 1; NOREF#82 1; NOREF#83 1; NOREF#87 1; NOREF#93 1; NOREF#103 1; NOREF#104 1; NOREF#108 1; NOREF#114 1; NOREF#115 1; NOREF#116 1; NOREF#119 1; NOREF#121 1; NOREF#123 1; NOREF#124 1; NOREF#125 1; U9 3 4; U11 1 2 4; U12 1 2 3 4; U14 3 4; U18 1 2 3 4; U20 3 4; U21 2 3 4; U23 3 4; U26 3 4; U28 1 2 3 4; U46 1 2 4; U47 1 2 3 4; U48 1; U49 1 2 4; U50 2 3 4; U55 2 3 4; U56 1 2 4; U58 1 2 3 4; U59 1 2 3 6 9 11 12; U60 1 2 4; U62 3 4; U63 11; U64 3 4; U65 3 4; U66 8 13 15 16; U67 3 4; U83 2 3 4; U85 3 4; U110 3; U111 3 4; U113 1 2 3 4; U166 1 2 4; U168 2 3 4

## Via types
v1: diameter 0.61, hole 0.305, TOP to BOTTOM, 397 vias

## Routing (per net, layer and track width the routed paths; a pad name or vN(x,y) marks a point on that pad's centre or on a via; arc(x,y) is an arc through that point)
GND_AL2_1: length 7.5
  TOP w0.381: U11.5 9.53,55.65 ; U11.5 8.59,54.71 ; U11.5 10.47,54.71 ; U11.5 9.53,53.77
  BOTTOM w0.381: U11.5 10.47,54.71 ; U11.5 9.53,53.77 ; U11.5 8.59,54.71 ; U11.5 9.53,55.65
  vias: v1(8,56.24) v1(8,53.7) v1(8,51.16) v1(8,48.62) v1(8,46.08) v1(8,43.54) v1(11.05,56.24) v1(13.59,56.24) v1(13.59,43.54) v1(16.13,56.24) v1(16.13,43.54) v1(18.67,56.24) v1(18.67,43.54) v1(21.21,56.24) v1(21.21,43.54) v1(23.75,56.24) v1(23.75,43.54) v1(26.29,56.24) v1(26.29,43.54) v1(31.37,56.24) v1(31.37,53.7) v1(31.37,51.16) v1(31.37,48.62) v1(31.37,46.08) v1(31.37,43.54)
GND_AL3_1: length 7.5
  TOP w0.381: 90.12,50.94 U23.5 ; U23.5 92,50.94 ; U23.5 91.06,50 ; U23.5 91.06,51.88
  BOTTOM w0.381: 90.12,50.94 U23.5 ; U23.5 92,50.94 ; U23.5 91.06,50 ; U23.5 91.06,51.88
  vias: v1(89.53,72.79) v1(89.53,70.25) v1(89.53,67.71) v1(89.53,65.17) v1(89.53,62.63) v1(89.53,60.09) v1(89.53,57.55) v1(89.53,55.01) v1(89.53,52.47) v1(89.53,49.42) v1(92.07,72.79) v1(92.07,49.42) v1(94.61,72.79) v1(94.61,49.42) v1(96.4,59.56) v1(97.15,72.79) v1(97.15,49.42) v1(97.67,59.56) v1(99.69,72.79) v1(99.69,49.42) v1(99.82,62.63) v1(102.23,72.79) v1(102.23,67.71) v1(102.23,65.17) v1(102.23,62.63) v1(102.23,60.09) v1(102.23,57.55) v1(102.23,55.01) v1(102.23,49.42)
GND_AL3_2: length 7.5
  TOP w0.381: U85.5 64.84,71.25 ; U85.5 63.9,72.19 ; U85.5 62.96,71.25 ; U85.5 63.9,70.31
  BOTTOM w0.381: U85.5 64.84,71.25 ; U85.5 63.9,72.19 ; U85.5 62.96,71.25 ; U85.5 63.9,70.31
  vias: v1(62.37,72.78) v1(62.37,70.24) v1(62.37,67.7) v1(62.37,65.16) v1(62.37,62.62) v1(62.37,60.08) v1(65.42,72.78) v1(67.96,72.78) v1(67.96,60.08) v1(70.5,72.78) v1(70.5,60.08) v1(73.04,72.78) v1(73.04,60.08) v1(75,63.7) v1(75.58,72.78) v1(75.58,60.08) v1(78.12,72.78) v1(78.12,60.08) v1(80.66,72.78) v1(80.66,60.08) v1(83.2,72.78) v1(85.74,72.78) v1(85.74,70.24) v1(85.74,67.7) v1(85.74,65.16) v1(85.74,62.62) v1(85.74,60.08)
GND_AL4: length 7.5
  TOP w0.381: U14.5 10.47,71.23 ; U14.5 8.59,71.23 ; U14.5 9.53,72.17 ; U14.5 9.53,70.29
  BOTTOM w0.381: U14.5 10.47,71.23 ; U14.5 8.59,71.23 ; U14.5 9.53,72.17 ; U14.5 9.53,70.29
  vias: v1(8,72.76) v1(8,70.22) v1(8,67.68) v1(8,65.14) v1(8,62.6) v1(8,60.06) v1(11.05,72.76) v1(13.59,72.76) v1(13.59,60.06) v1(16.13,72.76) v1(16.13,60.06) v1(18.67,72.76) v1(18.67,60.06) v1(21.21,72.76) v1(21.21,60.06) v1(23.75,72.76) v1(23.75,60.06) v1(26.29,72.76) v1(26.29,60.06) v1(28.83,72.76) v1(31.37,72.76) v1(31.37,70.22) v1(31.37,67.68) v1(31.37,65.14) v1(31.37,62.6) v1(31.37,60.06)
GND_AL7: length 7.5
  TOP w0.381: U20.5 37.63,71.24 ; U20.5 35.75,71.24 ; U20.5 36.69,72.18 ; U20.5 36.69,70.3
  BOTTOM w0.381: 36.69,70.3 U20.5 ; U20.5 37.63,71.24 ; U20.5 36.69,72.18 ; U20.5 35.75,71.24
  vias: v1(35.16,72.77) v1(35.16,70.23) v1(35.16,67.69) v1(35.16,65.15) v1(35.16,62.61) v1(35.16,60.07) v1(38.21,72.77) v1(40.75,72.77) v1(40.75,60.07) v1(43.29,72.77) v1(43.29,60.07) v1(45.83,72.77) v1(45.83,60.07) v1(48.37,72.77) v1(48.37,60.07) v1(50.91,72.77) v1(50.91,60.07) v1(53.45,72.77) v1(53.45,60.07) v1(55.99,72.77) v1(58.53,72.77) v1(58.53,70.23) v1(58.53,67.69) v1(58.53,65.15) v1(58.53,62.61) v1(58.53,60.07)
GND_HL1_1: length 7.5
  TOP w0.381: U28.5 36.7,55.68 ; U28.5 36.7,53.81 ; U28.5 35.76,54.75 ; U28.5 37.64,54.75
  BOTTOM w0.381: U28.5 36.7,55.68 ; U28.5 35.76,54.75 ; U28.5 37.64,54.75 ; U28.5 36.7,53.81
  vias: v1(35.18,56.27) v1(35.18,53.73) v1(35.18,51.19) v1(35.18,48.65) v1(35.18,46.11) v1(35.18,43.57) v1(38.22,56.27) v1(40.76,56.27) v1(40.76,43.57) v1(43.3,56.27) v1(43.3,43.57) v1(45.84,56.27) v1(45.84,43.57) v1(48.38,56.27) v1(48.38,43.57) v1(50.92,56.27) v1(50.92,43.57) v1(53.46,56.27) v1(53.46,43.57) v1(56,56.27) v1(58.54,56.27) v1(58.54,53.73) v1(58.54,51.19) v1(58.54,48.65) v1(58.54,46.11) v1(58.54,43.57)
GND_HL2_2: length 7.5
  TOP w0.381: U113.5 64.82,54.69 ; U113.5 63.88,55.63 ; U113.5 62.94,54.69 ; U113.5 63.88,53.75
  BOTTOM w0.381: 62.94,54.69 U113.5 ; U113.5 64.82,54.69 ; U113.5 63.88,53.75 ; U113.5 63.88,55.63
  vias: v1(62.35,56.22) v1(62.35,53.68) v1(62.35,51.14) v1(62.35,48.6) v1(62.35,46.06) v1(62.35,43.52) v1(65.4,56.22) v1(67.94,56.22) v1(67.94,43.52) v1(70.48,56.22) v1(70.48,43.52) v1(73.02,56.22) v1(73.02,43.52) v1(75.56,56.22) v1(75.56,43.52) v1(78.1,56.22) v1(78.1,47.33) v1(78.1,43.52) v1(80.64,56.22) v1(80.64,43.52) v1(83.18,56.22) v1(85.72,56.22) v1(85.72,53.68) v1(85.72,51.14) v1(85.72,48.6) v1(85.72,46.06) v1(85.72,43.52)
GND_MEM1: length 11.4
  TOP w0.254: U63.4 48,16.1 48.39,16.5 v1(48.39,16.88) ; U63.9 46.62,15.1 v1(46.87,15.35) 46.62,15.6 U63.8 ; v1(47.89,13.83) 47.63,14.08 U63.1
  TOP w0.381: U64.5 36.71,22.64 ; U64.5 36.71,20.76 ; U64.5 35.77,21.7 ; U64.5 37.65,21.7
  BOTTOM w0.381: 35.77,21.7 U64.5 ; U64.5 36.71,20.76 ; U64.5 36.71,22.64 ; U64.5 37.65,21.7
  vias: v1(35.19,23.23) v1(35.19,20.69) v1(35.19,18.15) v1(35.19,15.61) v1(35.19,13.07) v1(35.19,10.53) v1(38.23,23.23) v1(40.77,23.23) v1(40.77,10.53) v1(43.31,23.23) v1(43.31,10.53) v1(45.85,23.23) v1(45.85,10.53) v1(48.39,23.23) v1(48.39,10.53) v1(50.93,23.23) v1(50.93,10.53) v1(53.47,23.23) v1(53.47,10.53) v1(56.01,23.23) v1(58.55,23.23) v1(58.55,20.69) v1(58.55,18.15) v1(58.55,15.61) v1(58.55,13.07) v1(58.55,10.53)
GND_MEM2: length 10.4
  TOP w0.254: U66.3 v1(74.17,14.48) ; U66.12 74.67,13.22 74.3,13.59 v1(74.17,13.59) 74.04,13.59 73.67,13.22 U66.10
  TOP w0.381: 62.94,21.72 U67.5 ; U67.5 64.82,21.72 ; U67.5 63.88,20.78 ; U67.5 63.88,22.66
  BOTTOM w0.381: 63.88,20.78 U67.5 ; U67.5 62.94,21.72 ; U67.5 64.82,21.72 ; U67.5 63.88,22.66
  vias: v1(62.36,23.24) v1(62.36,20.7) v1(62.36,18.16) v1(62.36,15.62) v1(62.36,13.08) v1(62.36,10.54) v1(65.41,23.24) v1(67.94,23.24) v1(67.94,10.54) v1(70.48,23.24) v1(70.48,10.54) v1(73.03,23.24) v1(73.03,10.54) v1(75.56,23.24) v1(75.56,10.54) v1(78.11,23.24) v1(78.11,10.54) v1(80.64,23.24) v1(80.64,10.54) v1(83.19,23.24) v1(85.72,23.24) v1(85.72,20.7) v1(85.72,18.16) v1(85.72,15.62) v1(85.72,13.08) v1(85.72,10.54)
GND_TE1: length 7.5
  TOP w0.381: U49.5 9.53,39.17 ; U49.5 9.53,37.29 ; U49.5 10.47,38.23 ; U49.5 8.59,38.23
  BOTTOM w0.381: 8.59,38.23 U49.5 ; U49.5 10.47,38.23 ; U49.5 9.53,37.29 ; U49.5 9.53,39.17
  vias: v1(8.01,39.75) v1(8.01,37.21) v1(8.01,34.67) v1(8.01,32.13) v1(8.01,29.59) v1(8.01,27.05) v1(11.05,39.75) v1(13.59,39.75) v1(13.59,27.05) v1(16.13,39.75) v1(16.13,27.05) v1(18.67,39.75) v1(18.67,27.05) v1(21.21,39.75) v1(21.21,27.05) v1(23.75,39.75) v1(23.75,27.05) v1(26.29,39.75) v1(26.29,27.05) v1(28.83,39.75) v1(31.37,39.75) v1(31.37,37.21) v1(31.37,34.67) v1(31.37,32.13) v1(31.37,29.59) v1(31.37,27.05)
GND_TE2_1: length 15.1
  TOP w0.381: 100.1,27.9 J6.3 ; J6.3 101.04,28.84 ; J6.3 100.1,29.78 ; 90.15,23.76 U46.5 ; U46.5 92.03,23.76 ; U46.5 91.09,22.82 ; U46.5 91.09,24.7 ; C35.2 v1(98.55,38.36)
  BOTTOM w0.381: 99.16,28.84 J6.3 ; J6.3 100.1,29.78 ; J6.3 101.04,28.84 ; J6.3 100.1,27.9 ; 91.09,22.82 U46.5 ; U46.5 92.03,23.76 ; U46.5 91.09,24.7 ; U46.5 90.15,23.76
  vias: v1(89.56,45.6) v1(89.56,43.06) v1(89.56,40.52) v1(89.56,37.98) v1(89.56,35.44) v1(89.56,32.9) v1(89.56,30.36) v1(89.56,27.82) v1(89.56,25.28) v1(89.56,22.24) v1(92.1,45.6) v1(92.1,22.24) v1(94.64,45.6) v1(94.64,22.24) v1(97.18,45.6) v1(97.18,22.24) v1(99.72,45.6) v1(99.72,22.24) v1(102.26,45.6) v1(102.26,40.52) v1(102.26,37.98) v1(102.26,35.44) v1(102.26,32.9) v1(102.26,30.36) v1(102.26,27.82) v1(102.26,22.24)
GND_TE3_1: length 7.5
  TOP w0.381: U56.5 37.64,38.21 ; U56.5 36.7,39.15 ; U56.5 36.7,37.27 ; U56.5 35.76,38.21
  BOTTOM w0.381: 35.76,38.21 U56.5 ; U56.5 36.7,37.27 ; U56.5 37.64,38.21 ; U56.5 36.7,39.15
  vias: v1(35.18,39.74) v1(35.18,37.2) v1(35.18,34.66) v1(35.18,32.12) v1(35.18,29.58) v1(35.18,27.04) v1(38.22,39.74) v1(40.76,39.74) v1(40.76,27.04) v1(43.3,39.74) v1(43.3,27.04) v1(44.32,33.15) v1(45.84,39.74) v1(45.84,27.04) v1(47.09,33.69) v1(48.38,39.74) v1(48.38,27.04) v1(48.9,31.11) v1(50.92,39.74) v1(50.92,27.04) v1(53.46,39.74) v1(53.46,27.04) v1(56,39.74) v1(58.54,39.74) v1(58.54,37.2) v1(58.54,34.66) v1(58.54,32.12) v1(58.54,29.58) v1(58.54,27.04)
GND_TE3_7: length 7.5
  TOP w0.381: 63.88,37.29 U166.5 ; U166.5 62.94,38.23 ; U166.5 63.88,39.17 ; U166.5 64.82,38.23
  BOTTOM w0.381: U166.5 63.88,39.17 ; U166.5 64.82,38.23 ; U166.5 62.94,38.23 ; U166.5 63.88,37.29
  vias: v1(62.36,39.76) v1(62.36,37.22) v1(62.36,34.68) v1(62.36,32.14) v1(62.36,29.6) v1(62.36,27.06) v1(65.41,39.76) v1(67.95,39.76) v1(67.95,27.06) v1(70.49,39.76) v1(70.49,27.06) v1(71.5,33.15) v1(73.03,39.76) v1(73.03,27.06) v1(74.27,33.71) v1(75.57,39.76) v1(75.57,27.06) v1(75.95,31.37) v1(78.11,39.76) v1(78.11,27.06) v1(80.65,39.76) v1(80.65,27.06) v1(83.19,39.76) v1(85.73,39.76) v1(85.73,37.22) v1(85.73,34.68) v1(85.73,32.14) v1(85.73,29.6) v1(85.73,27.06)
GND_UV: length 15.9
  TOP w0.381: 13.62,12.84 J7.3 ; J7.3 14.56,11.9 ; J7.3 14.56,13.78 ; J7.3 15.5,12.84 ; 8.54,21.73 U60.5 ; U60.5 9.48,22.67 ; U60.5 10.42,21.73 ; U60.5 9.48,20.79
  TOP w0.508: U59.5 v1(19.9,15.13)
  BOTTOM w0.381: 8.54,21.73 U60.5 ; U60.5 9.48,22.67 ; U60.5 10.42,21.73 ; U60.5 9.48,20.79 ; J7.3 15.5,12.84 ; J7.3 14.56,13.78 ; J7.3 14.56,11.9 ; J7.3 13.62,12.84
  vias: v1(7.96,23.25) v1(7.96,20.71) v1(7.96,18.17) v1(7.96,15.63) v1(7.96,13.09) v1(7.96,10.55) v1(11.01,23.25) v1(13.55,23.25) v1(13.55,10.55) v1(16.09,23.25) v1(16.09,10.55) v1(18.63,23.25) v1(18.63,10.55) v1(21.17,23.25) v1(21.17,10.55) v1(23.71,23.25) v1(23.71,10.55) v1(26.25,23.25) v1(26.25,10.55) v1(28.79,23.25) v1(31.33,23.25) v1(31.33,20.71) v1(31.33,18.17) v1(31.33,15.63) v1(31.33,13.09) v1(31.33,10.55)
VDD_AL2_1: length 1.9
  TOP w0.381: 28.91,54.71 U9.5 29.85,53.77
VDD_AL3_1: length 1.9
  TOP w0.381: 91.06,70.32 U21.5 92,71.26
VDD_AL3_2: length 1.9
  TOP w0.381: 83.28,71.25 U83.5 84.22,70.31
VDD_AL4: length 1.9
  TOP w0.381: 29.85,70.29 U12.5 28.91,71.23
VDD_AL7: length 1.9
  TOP w0.381: 57.01,70.3 U18.5 56.07,71.24
VDD_HL1_1: length 1.9
  TOP w0.381: 57.02,53.81 U26.5 56.08,54.75
VDD_HL2_2: length 1.9
  TOP w0.381: 83.26,54.69 U111.5 84.2,53.75
VDD_MEM1: length 2.8
  TOP w0.381: 56.09,21.7 U62.5 ; U62.5 57.03,22.64 ; U62.5 57.03,20.76
VDD_MEM2: length 1.9
  TOP w0.381: 84.2,20.78 U65.5 83.26,21.72
VDD_TE1: length 1.9
  TOP w0.381: 29.85,37.29 U47.5 28.91,38.23
VDD_TE2_1: length 4.7
  TOP w0.381: 92.03,44.08 U50.5 91.09,43.14 ; J6.1 95.96,28.84 ; J6.1 95.02,29.78 ; J6.1 94.08,28.84
VDD_TE3_1: length 1.9
  TOP w0.381: 56.08,38.21 U55.5 57.02,37.27
VDD_TE3_7: length 1.9
  TOP w0.381: 84.2,37.29 U168.5 83.26,38.23
VDD_UV: length 4.7
  TOP w0.381: J7.1 15.5,17.92 ; J7.1 14.56,18.86 ; J7.1 13.62,17.92 ; 28.86,21.73 U58.5 29.8,20.79
PG VIA: length 1.5
  TOP w0.127: U48.2 v1(19.82,33.53)
N389549: length 4.6
  TOP w0.127: U59.4 15.17,15.99 J7.2
N390736: length 1.3
  TOP w0.127: C24.1 74.67,16.56 U66.2
N391399: length 18.5
  TOP w0.127: 84.2,10.29 U65.1 84.2,12.57 85.34,13.71 85.34,14.48 84.58,15.24 83.18,15.24 79.63,11.69 74.67,11.69 74.17,12.19 U66.11
N391445: length 13.3
  TOP w0.127: U65.2 82.68,14.1 79.88,11.3 73.91,11.3 73.17,12.05 U66.9
N442989: length 13.1
  TOP w0.127: U59.8 21.17,14.99 v1(21.04,15.12)
  BOTTOM w0.127: v1(21.04,15.12) 19.52,16.65 U60.3
N447814: length 13.3
  TOP w0.127: U63.5 47.12,16.62 v1(47.38,16.88)
  BOTTOM w0.127: v1(47.38,16.88) 48.03,17.53 48.9,17.53 52.85,13.57 55,13.57 U62.1
N447832: length 13.7
  TOP w0.127: v1(46.24,16.88) 46.62,16.49 U63.6
  BOTTOM w0.127: v1(46.24,16.88) 47.27,17.91 49.02,17.91 52.85,14.08 U62.2
N447948: length 12.4
  TOP w0.127: U63.12 47.12,13.34 46.6,12.81 42.31,12.81 41.04,14.08 U64.2
N447966: length 15.9
  TOP w0.127: U63.2 48.14,15.1 48.52,14.72 48.52,13.57 47.38,12.43 42.05,12.43 40.77,13.72 38.88,13.72 U64.1
N450158: length 10.3
  TOP w0.127: U66.6 66.92,14.6 U67.1
N450176: length 11.1
  TOP w0.127: U66.4 73.67,15.74 73.41,16 65.78,16 U67.2
N13665519: length 7.2
  TOP w0.127: R22.2 v1(22.65,64.37) C9.1 ; U13.4 v1(18.05,63.59)
  BOTTOM w0.127: v1(18.05,63.59) 21.86,63.59 v1(22.65,64.37)
N13665743: length 13.9
  TOP w0.127: U14.1 9.53,62.09 8.38,63.23 8.38,64.24 9.02,64.88 15.97,64.88 16.77,65.68 U13.3
N13665759: length 10.9
  TOP w0.127: U14.2 10.29,62.85 18.4,62.85 19.05,63.5 U13.5
N13666656: length 12.2
  TOP w0.127: U20.2 37.45,62.86 46.72,62.86 47.57,63.71 U19.4
N13666668: length 14.8
  TOP w0.127: U20.1 36.69,62.1 35.56,63.22 35.56,64.02 36.43,64.89 38.46,64.89 39.01,64.34 U19.3
N13667842: length 22.2
  TOP w0.127: R128.1 R129.2 17.24,47.46 17.4,47.62 17.4,48.39 18.18,49.17 v1(18.44,49.17) U10.3
  BOTTOM w0.127: U9.1 27.79,46.61 18.67,46.61 17.65,47.63 17.65,48.38 v1(18.44,49.17)
N13667854: length 20.7
  TOP w0.127: U9.2 28.98,47.09 27.56,48.51 25.15,48.51 24.98,48.35 R130.1 23.28,47.62 R131.2 ; U10.4 v1(18.35,47.82)
  BOTTOM w0.127: v1(18.35,47.82) 19.08,47.09 U9.2
N13667882: length 17.1
  TOP w0.127: U11.3 9.55,49.63 13.05,46.14 R132.2 20.28,46.14 20.96,45.47 C78.1 21.91,45.85 20.31,47.45 U10.5
N13672900: length 12
  TOP w0.127: v1(74.42,62.36) 74.17,62.61 U84.6
  BOTTOM w0.127: U85.2 64.02,63.76 66.68,63.76 67.45,62.99 73.79,62.99 v1(74.42,62.36)
N13672912: length 10.4
  TOP w0.127: U84.4 73.17,62.63 v1(72.65,62.1)
  BOTTOM w0.127: v1(72.65,62.1) 72.52,61.98 64.78,61.98 U85.1
N13672952: length 6.8
  TOP w0.127: R113.1 77.22,63.71 C40.1 76.51,62.28 75.95,61.72 74.17,61.72 73.67,62.22 U84.5
N13673048: length 16.4
  TOP w0.127: U83.1 82.82,62.48 80.14,62.48 78.87,61.21 72.39,61.21 71.5,62.1 70.23,62.1 70.2,62.14 R110.1
N13673052: length 6.5
  TOP w0.127: R109.1 71.55,65.01 v1(71.55,64.01) 71.55,63 R110.2 ; U84.2 73.67,66.66 v1(73.54,66.8)
  BOTTOM w0.127: v1(73.54,66.8) 71.55,64.82 v1(71.55,64.01)
N13688671: length 11.4
  TOP w0.127: U26.2 56.65,46.75 47.86,46.75 46.74,47.88 U27.B2
N13688703: length 13.6
  TOP w0.127: U26.1 55.23,46.37 47.73,46.37 46.23,47.88 46.23,48.77 46.36,48.9 U27.B1
N13718310: length 10.4
  TOP w0.127: U54.1 v1(45.6,33.12)
  BOTTOM w0.127: v1(45.6,33.12) 44.81,33.91 37.48,33.91 U56.3
N13718354: length 12.1
  TOP w0.127: U54.4 47.79,30.97 R33.2 48.42,29.83 55.24,29.83 U55.1
N13730509: length 12.1
  TOP w0.127: U167.4 74.97,31 R87.2 75.61,29.85 82.43,29.85 U168.1
N13730581: length 10.4
  TOP w0.127: U167.1 v1(72.78,33.15)
  BOTTOM w0.127: U166.3 64.64,33.91 72.02,33.91 v1(72.78,33.15)
N13736558: length 13.4
  TOP w0.127: U49.3 12.32,33.15 15.63,29.84 19.94,29.84 20.32,30.23 U48.3
N13756973: length 13.8
  TOP w0.127: U51.5 97.54,34.62 97.67,34.75 97.67,36.45 99.19,37.97 99.19,39.12 98.42,39.89 R32.2 97.6,41.08 100.6,44.08 U50.1
N13757025: length 16.6
  TOP w0.127: U46.3 98.81,26.4 98.81,29.84 101.22,32.26 101.22,36.14 100.84,36.52 U51.3
N13757041: length 6.5
  TOP w0.127: J6.2 98.05,29.32 98.05,31.11 99.27,32.34 U51.1
N13898772: length 2.6
  TOP w0.127: R155.2 53.22,54.74 U32.1
N13898795: length 2.6
  TOP w0.127: U32.2 50.68,54.74 R156.2
N13898839: length 2.6
  TOP w0.127: R157.2 48.14,54.74 U32.3
N13898843: length 2.6
  TOP w0.127: R158.2 45.6,54.74 U32.4
N13898847: length 2.6
  TOP w0.127: R159.2 43.06,54.74 U32.5
N13898851: length 2.8
  TOP w0.127: U32.6 41.02,54.23 R160.2
N13901484: length 13.1
  TOP w0.127: U110.5 74.46,48.38 74.29,48.22 74.29,46.44 74.8,45.93 82.8,45.93 U111.1
N13901676: length 10.4
  TOP w0.127: U110.1 74.81,46.43 74.93,46.31 83.44,46.31 U111.2
N13901780: length 2.6
  TOP w0.127: U112.1 80.39,54.69 R161.2
N13901810: length 2.6
  TOP w0.127: U112.2 77.85,54.69 R162.2
N13901830: length 2.6
  TOP w0.127: U112.3 75.31,54.69 R163.2
N13901834: length 2.6
  TOP w0.127: R164.2 72.77,54.69 U112.4
N13901838: length 2.6
  TOP w0.127: R165.2 70.23,54.69 U112.5
N13901842: length 2.8
  TOP w0.127: R166.2 68.2,54.18 U112.6
N13903337: length 2.7
  TOP w0.127: U16.1 26.29,54.46 R167.2
N13903349: length 2.7
  TOP w0.127: U16.2 23.75,54.46 R168.2
N13903369: length 2.7
  TOP w0.127: U16.3 21.21,54.46 R169.2
N13903373: length 2.7
  TOP w0.127: R170.2 18.67,54.46 U16.4
N13903377: length 2.7
  TOP w0.127: U16.5 16.13,54.46 R171.2
N13903381: length 2.7
  TOP w0.127: U16.6 13.59,54.46 R172.2
N13905346: length 2.1
  TOP w0.127: U82.1 80.39,71.24 R173.2
N13905358: length 2.1
  TOP w0.127: U82.2 77.85,71.24 R174.2
N13905378: length 2.1
  TOP w0.127: R175.2 75.31,71.24 U82.3
N13905382: length 2.1
  TOP w0.127: R176.2 72.77,71.24 U82.4
N13905386: length 2.2
  TOP w0.127: U82.5 70.36,71.14 R177.2
N13905390: length 2.3
  TOP w0.127: R178.2 68.07,70.88 U82.6
N13908753: length 12.1
  TOP w0.127: U22.6 99.56,61.22 v1(99.82,61.49)
  BOTTOM w0.127: U23.2 99.19,51.45 99.19,60.85 v1(99.82,61.49)
N13908765: length 10.8
  TOP w0.127: v1(99.82,59.83) 99.43,60.22 U22.4
  BOTTOM w0.127: v1(99.82,59.83) 99.57,59.58 99.57,52.59 U23.1
N13908801: length 6.9
  TOP w0.127: R25.1 C12.1 99.78,63.56 100.46,62.88 100.46,61.1 100.08,60.72 U22.5
N13908859: length 17.5
  TOP w0.127: U21.1 99.82,69.87 99.82,66.42 101.6,64.64 101.6,59.31 99.41,57.11 R23.1
N13908863: length 5
  TOP w0.127: R23.2 R24.1 95.51,59.35 95.51,60.58 95.65,60.72 U22.2
N13909193: length 2.1
  TOP w0.127: R179.2 91.07,67.44 U25.1
N13909205: length 2.1
  TOP w0.127: U25.2 91.07,64.9 R180.2
N13909225: length 2.1
  TOP w0.127: U25.3 91.07,62.36 R181.2
N13909229: length 2.1
  TOP w0.127: U25.4 91.07,59.82 R182.2
N13909233: length 2.2
  TOP w0.127: R183.2 91.17,57.41 U25.5
N13909237: length 2.3
  TOP w0.127: U25.6 91.43,55.12 R184.2
N13909909: length 2.2
  TOP w0.127: U17.1 26.04,71.23 R185.2
N13909921: length 2.2
  TOP w0.127: U17.2 23.5,71.23 R186.2
N13909941: length 2.2
  TOP w0.127: U17.3 20.96,71.23 R187.2
N13909945: length 2.2
  TOP w0.127: U17.4 18.42,71.23 R188.2
N13909949: length 2.2
  TOP w0.127: R189.2 15.88,71.23 U17.5
N13909953: length 2.4
  TOP w0.127: U17.6 13.72,70.85 R190.2
N13911178: length 2.3
  TOP w0.127: R191.2 53.22,71.22 U24.1
N13911190: length 2.3
  TOP w0.127: R192.2 50.68,71.22 U24.2
N13911210: length 2.3
  TOP w0.127: R193.2 48.14,71.22 U24.3
N13911214: length 2.3
  TOP w0.127: R194.2 45.6,71.22 U24.4
N13911218: length 2.3
  TOP w0.127: U24.5 43.06,71.22 R195.2
N13911222: length 2.5
  TOP w0.127: R196.2 41.02,70.71 U24.6
N13915286: length 3.2
  TOP w0.127: R198.2 24.77,20.41 U61.2
N13915306: length 3.4
  TOP w0.127: U61.3 22.86,19.78 R199.2
N13917128: length 2.1
  TOP w0.127: U68.1 53.22,21.7 R203.2
N13917140: length 2.1
  TOP w0.127: R204.2 50.68,21.7 U68.2
N13917160: length 2.1
  TOP w0.127: R205.2 48.14,21.7 U68.3
N13917164: length 2.1
  TOP w0.127: U68.4 45.6,21.7 R206.2
N13917168: length 2.1
  TOP w0.127: R207.2 43.06,21.7 U68.5
N13917172: length 2.2
  TOP w0.127: U68.6 40.78,21.45 R208.2
N13918167: length 2.1
  TOP w0.127: R209.2 80.39,21.72 U69.1
N13918179: length 2.1
  TOP w0.127: R210.2 77.85,21.72 U69.2
N13918199: length 2.1
  TOP w0.127: R211.2 75.31,21.72 U69.3
N13918203: length 2.1
  TOP w0.127: U69.4 72.77,21.72 R212.2
N13918207: length 2.1
  TOP w0.127: R213.2 70.23,21.72 U69.5
N13918211: length 2.2
  TOP w0.127: R214.2 67.95,21.46 U69.6
N13920413: length 2.6
  TOP w0.127: U53.1 26.04,38.22 R215.2
N13920425: length 2.6
  TOP w0.127: R216.2 23.5,38.22 U53.2
N13920445: length 2.6
  TOP w0.127: U53.3 20.96,38.22 R217.2
N13920449: length 2.6
  TOP w0.127: U53.4 18.42,38.22 R218.2
N13920453: length 2.6
  TOP w0.127: U53.5 15.88,38.22 R219.2
N13920457: length 2.7
  TOP w0.127: U53.6 13.6,37.97 R220.2
N13921886: length 2.1
  TOP w0.127: R221.2 53.21,38.21 U57.1
N13921894: length 2.1
  TOP w0.127: R222.2 50.67,38.21 U57.2
N13921914: length 2.1
  TOP w0.127: U57.5 43.05,38.21 R225.2
N13921918: length 2.1
  TOP w0.127: R224.2 45.59,38.21 U57.4
N13921922: length 2.1
  TOP w0.127: R223.2 48.13,38.21 U57.3
N13921934: length 2.2
  TOP w0.127: U57.6 40.77,37.95 R226.2
N13923440: length 2.1
  TOP w0.127: U169.1 80.4,38.23 R227.2
N13923452: length 2.1
  TOP w0.127: R228.2 77.86,38.23 U169.2
N13923472: length 2.1
  TOP w0.127: U169.3 75.32,38.23 R229.2
N13923476: length 2.1
  TOP w0.127: U169.4 72.78,38.23 R230.2
N13923480: length 2.1
  TOP w0.127: U169.5 70.24,38.23 R231.2
N13923484: length 2.2
  TOP w0.127: R232.2 67.95,37.98 U169.6
N13928759: length 2.9
  TOP w0.127: U52.1 91.72,40.91 R233.2
N13928771: length 3.2
  TOP w0.127: R234.2 92.4,39.04 U52.2
N13928791: length 3.4
  TOP w0.127: U52.3 93.04,37.14 R235.2
N13928795: length 3.7
  TOP w0.127: U52.4 91.14,32.65 R236.2
N13928799: length 4.4
  TOP w0.127: U52.5 92.46,31.48 92.46,32.19 R237.2
N13928803: length 5.2
  TOP w0.127: U52.6 92.87,29.36 92.87,30.83 R238.2
N13930681: length 2.9
  TOP w0.127: U61.1 26.63,21.09 R197.2
N13930699: length 3.7
  TOP w0.127: U61.4 20.96,19.14 R200.2
N13930701: length 4.4
  TOP w0.127: R201.2 18.07,20.19 17.37,20.19 U61.5
N13930703: length 5.2
  TOP w0.127: R202.2 16.55,19.94 15.08,19.94 U61.6
N139310850: length 2.2
  TOP w0.127: U59.10 24.03,12.99 C21.1

## Copper pours and planes (outline as drawn; the poured copper is in the pictures)
GND_AL2_1 on TOP (solid shape): outline of 1169 points within 7.62,43.16 31.75,56.62
GND_AL2_1 on BOTTOM (solid shape): outline of 1031 points within 7.62,43.16 31.75,56.62
GND_AL3_1 on TOP (solid shape): 98.25,63.11 98.42,63.11 98.42,62.98 98.93,62.98 98.93,63.11 99.11,63.11 99.11,63.31 99.68,63.31 100.21,62.78 100.21,62.02 100.17,61.93 100.06,61.93 99.6,61.94 99.32,61.57 99.31,61.53 98.37,61.53 98.37,61.5 97.85,61.5 97.81,61.53 97.82,61.59 97.87,61.64 97.87,63.2 97.84,63.2 97.84,63.31 98.25,63.31
GND_AL3_1 on TOP (solid shape): outline of 1190 points within 89.15,49.04 102.62,73.17
GND_AL3_1 on BOTTOM (solid shape): outline of 1047 points within 89.15,49.04 102.62,73.17
GND_AL3_2 on TOP (solid shape): 74.45,65.23 74.51,65.32 74.62,65.3 74.97,64.95 75.19,64.95 75.19,64.87 75.69,64.87 75.69,64.95 76.79,64.95 76.79,64.16 76.98,64.16 76.98,63.81 76.6,63.43 76.06,63.43 76.06,63.25 75.93,63.25 75.93,62.74 76.06,62.74 76.06,62.57 76.26,62.57 76.26,62.38 75.85,61.96 74.96,61.96 74.87,62.01 74.87,62.11 74.88,62.57 74.52,62.86 74.48,62.86 74.48,63.6 74.45,63.6
GND_AL3_2 on TOP (solid shape): outline of 1136 points within 61.99,59.7 86.12,73.16
GND_AL3_2 on BOTTOM (solid shape): outline of 1140 points within 61.99,59.7 86.12,73.16
GND_AL4 on TOP: 31.75,73.14 31.75,59.67 7.62,59.67 7.62,73.14
GND_AL4 on BOTTOM: 31.75,73.14 7.62,73.14 7.62,59.67 31.75,59.67
GND_AL7 on TOP: 58.91,73.15 58.91,59.69 34.78,59.69 34.78,73.15
GND_AL7 on BOTTOM: 58.91,73.15 34.78,73.15 34.78,59.69 58.91,59.69
GND_HL1_1 on TOP: 58.93,56.65 58.93,43.19 34.8,43.19 34.8,56.65 ; 1 cut-out
GND_HL1_1 on BOTTOM: 58.93,56.65 34.8,56.65 34.8,43.19 58.93,43.19
GND_HL2_2 on TOP: 86.1,56.6 86.1,43.14 61.97,43.14 61.97,56.6 ; 1 cut-out
GND_HL2_2 on BOTTOM: 86.1,56.6 61.97,56.6 61.97,43.14 86.1,43.14
GND_MEM1 on TOP: 58.94,23.61 58.94,10.15 34.81,10.15 34.81,23.61 ; 1 cut-out
GND_MEM1 on BOTTOM: 58.94,23.61 34.81,23.61 34.81,10.15 58.94,10.15
GND_MEM2 on TOP: 86.11,23.62 86.11,10.16 61.98,10.16 61.98,23.62 ; 1 cut-out
GND_MEM2 on BOTTOM: 86.11,23.62 61.98,23.62 61.98,10.16 86.11,10.16
GND_TE1 on TOP (solid shape): outline of 1067 points within 7.63,26.67 31.76,40.13
GND_TE1 on BOTTOM (solid shape): outline of 1005 points within 7.63,26.67 31.76,40.13
GND_TE2_1 on TOP: 89.18,45.98 102.64,45.98 102.64,21.85 89.18,21.85
GND_TE2_1 on BOTTOM: 89.18,45.98 89.18,21.85 102.64,21.85 102.64,45.98
GND_TE3_1 on TOP: 58.92,40.12 58.92,26.65 34.79,26.65 34.79,40.12 ; 1 cut-out
GND_TE3_1 on BOTTOM: 58.92,40.12 34.79,40.12 34.79,26.65 58.92,26.65
GND_TE3_7 on TOP: 86.11,40.14 86.11,26.68 61.98,26.68 61.98,40.14 ; 1 cut-out
GND_TE3_7 on BOTTOM: 86.11,40.14 61.98,40.14 61.98,26.68 86.11,26.68
GND_UV on TOP: 31.71,23.63 31.71,10.17 7.58,10.17 7.58,23.63
GND_UV on BOTTOM: 31.71,23.63 7.58,23.63 7.58,10.17 31.71,10.17
VDD_AL2_1 on TOP (solid shape): outline of 249 points within 13.21,48.51 30.86,55.73
VDD_AL3_1 on TOP (solid shape): outline of 173 points within 90.04,54.61 97.67,72.28
VDD_AL3_2 on TOP (solid shape): outline of 276 points within 67.69,65.16 85.23,72.27
VDD_AL4 on TOP: 30.36,72.25 30.86,71.74 30.86,68.2 28.2,65.53 22.1,65.53 22.1,64.9 20.18,64.9 19.56,65.52 18.93,65.52 18.93,66.04 13.72,66.04 13.34,66.42 13.34,68.07 26.29,68.07 26.93,68.71 26.93,71.87 27.31,72.25
